# EAGLE board TAGPCBv4 (EAGLE 7.4.0)
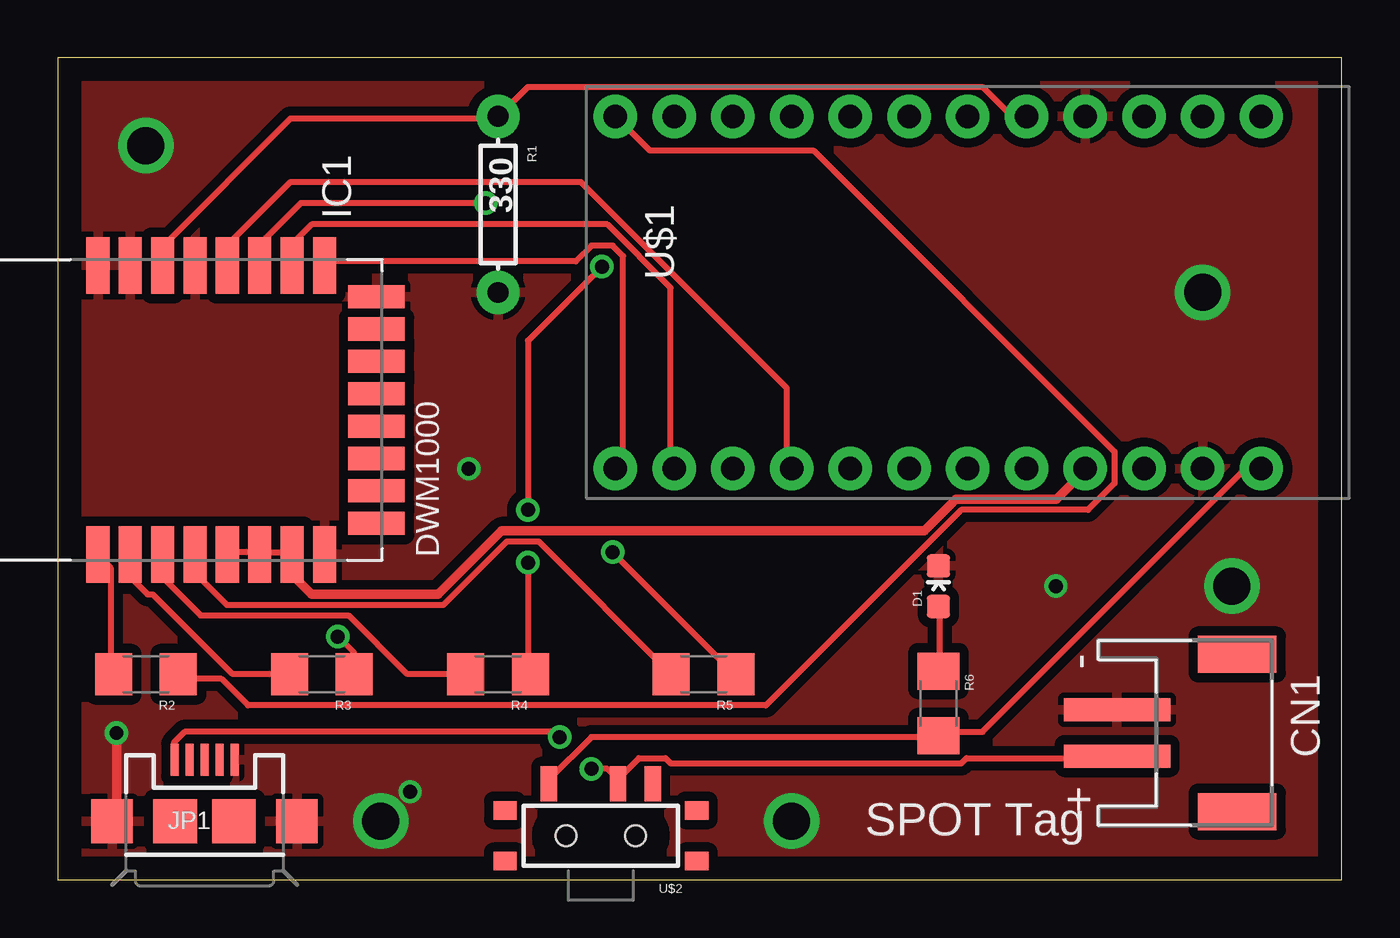
[diagram p0: board, top side]
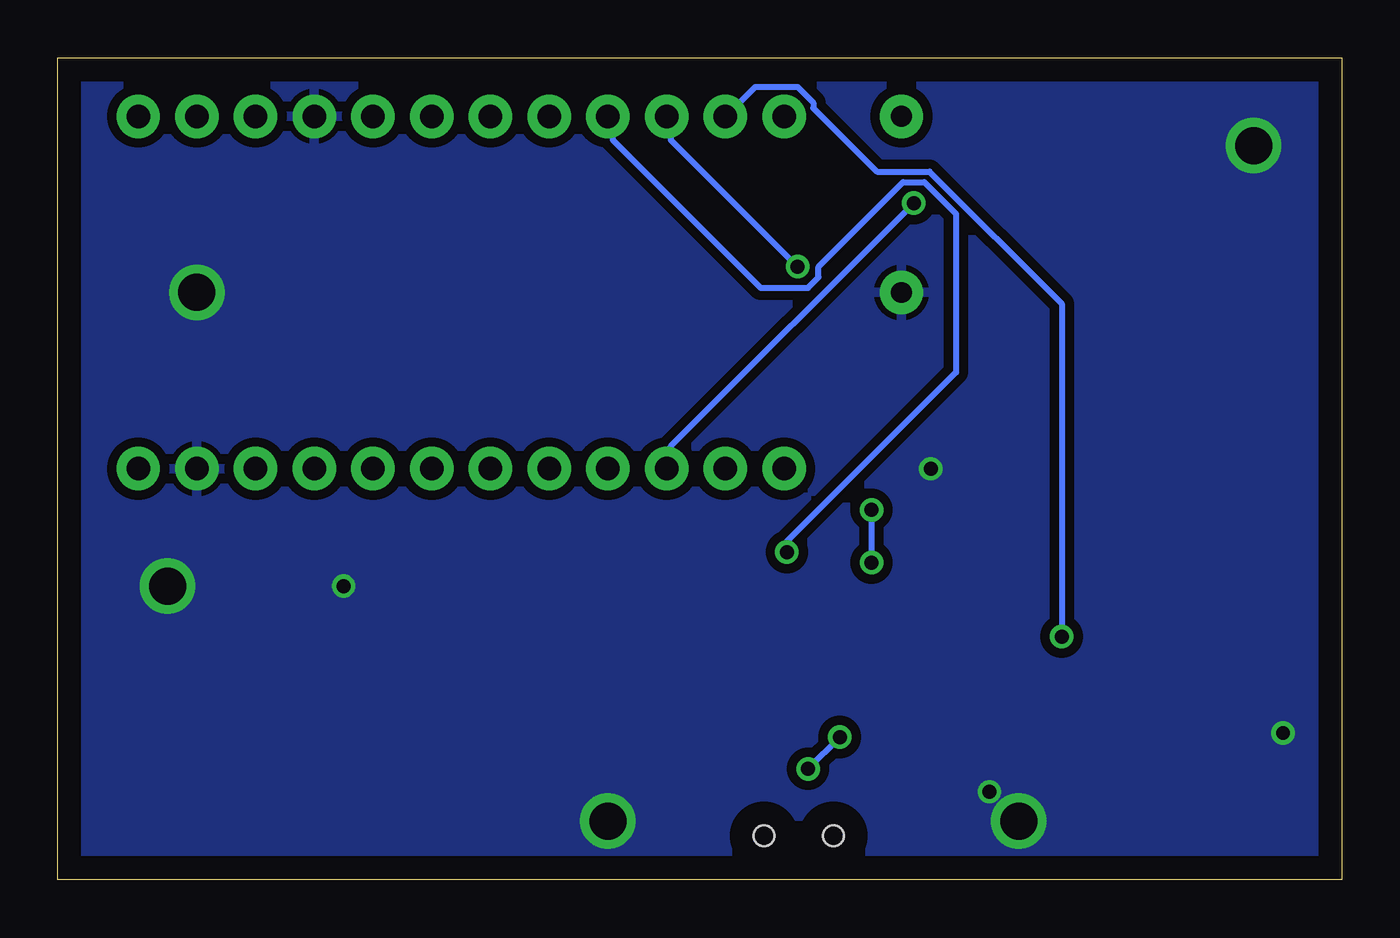
[diagram p1: board, bottom side, seen from below]

Size 55.55 x 35.55 mm. Coordinates in mm from the lower left corner, seen from the top.
Outline: 0,0 55.55,0 55.55,35.55 0,35.55 0,0
Copper layers (1*16): Top 0.035mm / dielectric 1.5mm / Bottom 0.035mm
Design rules "default *": minimum track width 10mil, minimum drill 24mil, track to track 8mil, track to pad 8mil, pad to pad 8mil, via to via 8mil, smd to smd 8mil, copper to edge 40mil, drill to drill 8mil, minimum pad ring 10mil, minimum via ring 8mil, stop-mask expansion 4mil, vias tented up to drill 0mil, thermal gap 10mil

## Footprints (pad centres in the part's own frame; a part is rotated, then mirrored left to right if it is on the bottom)
JST-PH-2-SMT-RA = smd 1 x 4.6: 1 1,-3.7; 2 -1,-3.7 | smd 1.6 x 3.4: NC1 -3.4,1.5; NC2 3.4,1.5
LED-0603 = smd 1 x 1: A 0,-0.877; C 0,0.877
DWM1000 = smd 2.45 x 1: 1 -6.25,0.8; 2 -6.25,-0.6; 3 -6.25,-2; 4 -6.25,-3.4; 5 -6.25,-4.8; 6 -6.25,-6.2; 7 -6.25,-7.6; 8 -6.25,-9; 17 6.25,-9; 18 6.25,-7.6; 19 6.25,-6.2; 20 6.25,-4.8; 21 6.25,-3.4; 22 6.25,-2; 23 6.25,-0.6; 24 6.25,0.8 | smd 1 x 2.45: 9 -4.9,-11.25; 10 -3.5,-11.25; 11 -2.1,-11.25; 12 -0.7,-11.25; 13 0.7,-11.25; 14 2.1,-11.25; 15 3.5,-11.25; 16 4.9,-11.25
USB-MICROB = smd 0.35 x 1.4: D+ 0,2.65; D- -0.65,2.65; GND 1.3,2.65; ID 0.65,2.65; VBUS -1.3,2.65 | smd 1.8 x 1.9: MT1 -4,0; MT2 4,0 | smd 1.9 x 1.9: P$1 -1.27,0; P$2 1.27,0
AXIAL-0.3 = drill 0.9 pad 1.88: P$1 -3.81,0; P$2 3.81,0
1206 = smd 1.6 x 1.8: 1 -1.4,0; 2 1.4,0
ARDUINO_MINI = drill 1.016 pad 1.88: 1 -7.62,12.7; 2 -7.62,10.16; 3 -7.62,7.62; 4 -7.62,5.08; 5 -7.62,2.54; 6 -7.62,0; 7 -7.62,-2.54; 8 -7.62,-5.08; 9 -7.62,-7.62; 10 -7.62,-10.16; 11 -7.62,-12.7; 12 -7.62,-15.24; 13 7.62,-15.24; 14 7.62,-12.7; 15 7.62,-10.16; 16 7.62,-7.62; 17 7.62,-5.08; 18 7.62,-2.54; 19 7.62,0; 20 7.62,2.54; 21 7.62,5.08; 22 7.62,7.62; 23 7.62,10.16; 24 7.62,12.7
KPS-1290 = smd 0.7 x 1.5: O -2.25,2.25; P 0.75,2.25; S 2.25,2.25 | smd 1 x 0.8: P$1 -4.15,1.1; P$2 -4.15,-1.1; P$3 4.15,-1.1; P$4 4.15,1.1 | hole 0.9: -1.5,0; 1.5,0

## Placement (x,y rotation side)
CN1  [JST-PH-2-SMT-RA]  49.53,6.35 270 top
D1  GREEN  [LED-0603]  38.1,12.7 0 top
IC1  DWM1000  [DWM1000]  2.54,20.32 90 top
JP1  USB-MICROB  [USB-MICROB]  6.35,2.54 0 top
R1  330  [AXIAL-0.3]  19.05,29.21 270 top
R2  0R  [1206]  3.81,8.89 180 top
R3  0R  [1206]  11.43,8.89 180 top
R4  100K  [1206]  19.05,8.89 180 top
R5  0R  [1206]  27.94,8.89 180 top
R6  1K  [1206]  38.1,7.62 270 top
U$1  ARDUINO_MINI  [ARDUINO_MINI]  39.37,25.4 270 top
U$2  SWITCH_SPDT  [KPS-1290]  23.5,1.91 0 top

## Library data of the parts
CN1 = adafruit
D1 = SparkFun-LED; PROD_ID: DIO-00821
IC1 = decawave
JP1 = SparkFun-Connectors; PROD_ID: CONN-09505
R1-R6 = SparkFun-Resistors
U$1 = SparkFun-Boards
U$2 = SparkFun-Electromechanical; PROD_ID: SWCH-10651

## Nets
GND: CN1.2 D1.C IC1.8 IC1.16 IC1.21 IC1.23 IC1.24 JP1.GND JP1.MT1 JP1.MT2 R1.P$2 U$1.4 U$1.23
N$1: IC1.17 U$1.13
N$2: IC1.22 R1.P$1 U$1.5
N$3: IC1.18 U$1.14
N$4: IC1.19 U$1.15
N$5: IC1.20 U$1.16
N$6: R6.2 U$1.24 U$2.O
N$7: CN1.1 JP1.VBUS U$2.P
N$8: IC1.5 IC1.6 IC1.7 U$1.21
N$9: R2.1 U$1.12
N$10: IC1.1 R2.2
N$11: R3.1 U$1.11
N$12: IC1.2 R3.2
N$13: IC1.3 R4.2
N$14: R4.1 U$1.10
N$15: R5.1 U$1.9
N$16: IC1.4 R5.2
N$17: U$2.S
N$18: D1.A R6.1

## Tracks (layer width: path | path; a pad name or v marks a point on that pad's centre or on a via)
GND  (via drill 0.6, 1.6)
  Top 0.406: JP1.MT1 2.54,2.73 v2.54,6.35
  other vias: 15.24,3.81 43.18,12.7 17.78,17.78 13.97,2.54 31.75,2.54 50.8,12.7 49.53,25.4 3.81,31.75
  pour Bottom (isolate 0.406): 0,0 0,35.56 55.88,35.56 55.88,0
  pour Top (isolate 0.406): 0,0 0,35.56 55.88,35.56 55.88,34.29 55.88,0
N$1
  Top 0.254: IC1.17 11.66,26.75 22.4,26.75 23.09,27.43 24,27.43 24.46,26.98 24.46,18.06 24.23,17.83 U$1.13
N$2
  Top 0.254: IC1.22 4.57,26.75 4.57,27.43 10.06,32.92 18.97,32.92 R1.P$1 19.2,33.15 20.34,34.29 40.01,34.29 41.15,33.15 41.83,33.15 U$1.5
N$3
  Top 0.254: IC1.18 10.29,26.75 10.29,27.66 10.97,28.35 23.77,28.35 26.52,25.6 26.52,17.83 U$1.14
N$4  (via drill 0.61)
  Top 0.254: v18.52,29.26 10.52,29.26 8.91,27.66 8.91,26.75 IC1.19
  Bottom 0.254: v18.52,29.26 29.03,18.75 29.03,17.83 U$1.15
N$5
  Top 0.254: IC1.20 7.54,26.75 7.54,27.66 10.06,30.18 22.63,30.18 31.55,21.26 31.55,17.83 U$1.16
N$6
  Top 0.254: U$2.O 21.26,4.34 23.09,6.17 37.95,6.17 R6.2 38.18,6.4 40.01,6.4 51.21,17.6 51.89,17.6 U$1.24
N$7  (via drill 0.61)
  Top 0.254: v21.72,6.17 21.49,6.4 5.49,6.4 5.03,5.94 5.03,5.26 JP1.VBUS | v23.09,4.8 23.77,4.8 24.23,4.34 | 24.23,4.34 25.15,5.26 26.29,5.26 26.52,5.03 39.09,5.03 39.32,5.26 45.72,5.26 CN1.1 | 24.23,4.34 U$2.P
  Bottom 0.254: v23.09,4.8 v21.72,6.17
N$8
  Top 0.254: IC1.5 7.54,14.17 8.69,14.17 IC1.6 8.91,14.17 10.06,14.17 IC1.7 10.29,13.95 10.29,13.03 | 44.35,17.6 U$1.21
  Top 0.406: 10.29,13.03 10.97,12.34 16.46,12.34 19.2,15.09 37.49,15.09 38.86,16.46 43.2,16.46 44.35,17.6
N$9
  Top 0.254: U$1.12 25.6,31.55 32.69,31.55 45.72,18.52 45.72,17.14 44.58,16 39.09,16 30.63,7.54 8.23,7.54 7.09,8.69 5.26,8.69 R2.1
N$10
  Top 0.254: R2.2 2.29,8.91 2.29,13.49 1.83,13.95 IC1.1
N$11  (via drill 0.61)
  Top 0.254: v12.12,10.52 12.8,9.83 12.8,8.91 R3.1
  Bottom 0.254: v12.12,10.52 12.12,24.92 17.83,30.63 20.12,30.63 22.86,33.38 22.86,33.6 23.55,34.29 25.38,34.29 26.52,33.15 U$1.11
N$12
  Top 0.254: R3.2 9.83,8.91 7.54,8.91 4.12,12.34 3.89,12.34 3.2,13.03 3.2,13.95 IC1.2
N$13
  Top 0.254: R4.2 17.6,8.91 15.09,8.91 12.57,11.43 6.17,11.43 4.57,13.03 4.57,13.95 IC1.3
N$14  (via drill 0.61)
  Top 0.254: v20.34,13.72 20.34,8.91 R4.1 | v20.34,16 20.34,23.32 v23.55,26.52
  Bottom 0.254: v20.34,16 v20.34,13.72 | v23.55,26.52 29.03,32 29.03,32.92 U$1.10
N$15  (via drill 0.61)
  Top 0.254: v24,14.17 29.26,8.91 R5.1
  Bottom 0.254: v24,14.17 24,14.63 16.69,21.95 16.69,28.8 18.06,30.18 18.97,30.18 22.63,26.52 22.63,26.06 23.09,25.6 25.15,25.6 31.55,32 31.55,32.92 U$1.9
N$16
  Top 0.254: R5.2 26.52,8.91 20.8,14.63 19.43,14.63 16.69,11.89 7.32,11.89 5.94,13.26 5.94,13.95 IC1.4
N$18
  Top 0.254: D1.A 38.18,11.66 38.18,9.14 R6.1

## Text on the board
tSilk: DWM1000 | SPOT Tag